# Altium PCB FPv0.13.PcbDoc (part 2 of 2)
Units mm, origin at the board's own origin, x right, y up, seen from the top; angles counter-clockwise.
Board outline 81.28 x 53.34 mm, 4 copper layers (Top Layer, GROUND PLANE, MidLayer1, Bottom Layer); 86 components, 142 nets, 542 pads, 250 vias.
Unrouted connection lines stored in the file: 1.
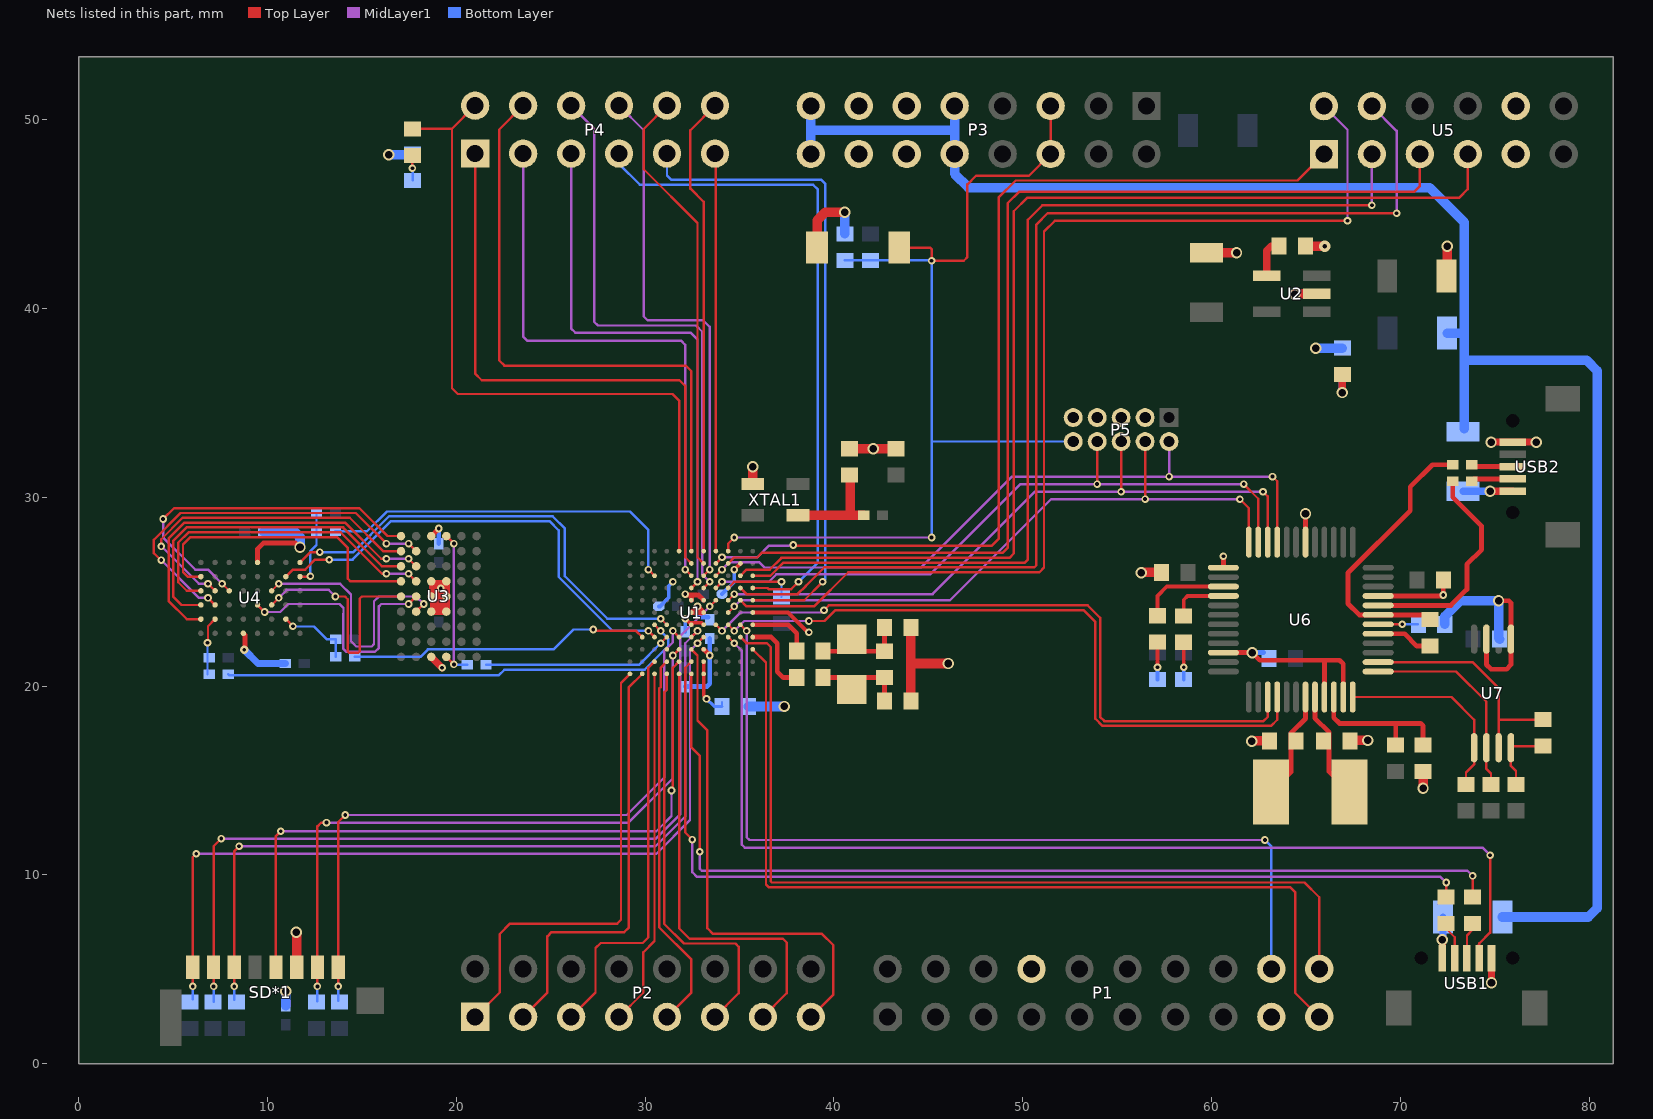
[diagram p4: the nets of this part, all layers, seen from the top]

## Via types
v1: diameter 0.403, hole 0.2, Top Layer to Bottom Layer, tented both sides, 209 vias
v2: diameter 0.6, hole 0.4, Top Layer to Bottom Layer, tented both sides, 39 vias
v3: diameter 0.6, hole 0.24, Top Layer to Bottom Layer, tented both sides, 1 vias
v4: diameter 0.453, hole 0.2, Top Layer to Bottom Layer, tented both sides, 1 vias

## Nets (pads, with @x,y where several pads share a name; then routed paths per layer and width w, separated by ;. In a path a pad name is that pad's centre, name@x,y a point inside that pad or via, vN(x,y) a via of type N, cw(c..) or ccw(c..) an arc to the next point about the centre after c; other vN are vias at no path point) (continued)
ADDR6: U3.F2 U4.C3 | length 14.2
  Top Layer w0.127: U4.C3@10.225,25.05 v1(10.6,25.425) ; U3.F2@17.875,23.95 v1(18.275,24.35)
  MidLayer1 w0.127: v1(10.6,25.425) 13.85,25.425 14.425,24.85 14.425,22.375 14.7,22.1 15.521,22.1 15.646,22.225 15.646,24.496 15.9,24.75 17.875,24.75 v1(18.275,24.35)
ADDR7: U3.E1 U4.C4 | length 13
  Top Layer w0.127: U4.C4@10.225,24.3 v1(10.6,24.675) ; v1(13.6,24.75) 14.1,24.75 14.25,24.6 14.25,21.85 14.326,21.774 14.816,21.774 14.892,21.85 14.892,24.642 15,24.75 U3.E1@17.075,24.75
  MidLayer1 w0.127: v1(10.6,24.675) 11.025,25.1 13.25,25.1 v1(13.6,24.75)
ADDR8: U3.E2 U4.D4 | length 13.6
  Top Layer w0.127: U4.D4@9.475,24.3 v1(9.85,23.925) ; v1(17.475,24.35) U3.E2@17.875,24.75
  MidLayer1 w0.127: v1(9.85,23.925) 10.675,23.925 11.1,24.35 13.825,24.35 14.029,24.146 14.029,23.841 14.025,23.837 14.025,21.975 14.188,21.812 15.687,21.812 15.9,22.025 15.9,24.225 16.025,24.35 v1(17.475,24.35)
ADDR9: U3.D1 U4.H2 | length 16.1
  Top Layer w0.127: U4.H2@6.475,25.8 5.775,25.8 5.529,26.046 5.529,27.499 5.923,27.892 13.683,27.892 14.263,27.313 14.263,25.687 14.4,25.55 U3.D1@17.075,25.55
ADDR10: U3.D2 U4.H3 | length 17.4
  Top Layer w0.127: U4.H3@6.475,25.05 5.725,25.05 5.275,25.5 5.275,27.604 5.818,28.146 13.879,28.146 16.075,25.95 v1(16.3,25.95) ; v1(17.475,25.95) U3.D2@17.875,25.55
  MidLayer1 w0.127: v1(16.3,25.95) v1(17.475,25.95)
ADDR11: U3.C1 U4.H4 | length 17.8
  Top Layer w0.127: U4.H4@6.475,24.3 5.45,24.3 5.021,24.729 5.021,27.709 5.72,28.408 14.006,28.408 16.064,26.35 U3.C1@17.075,26.35
ADDR12: U3.C2 U4.H5 | length 19.8
  Top Layer w0.127: U4.H5@6.475,23.55 5.725,23.55 4.767,24.508 4.767,27.814 5.615,28.662 14.113,28.662 16.025,26.75 v1(16.3,26.75) ; v1(17.475,26.75) U3.C2@17.875,26.35
  MidLayer1 w0.127: v1(16.3,26.75) v1(17.475,26.75)
ADDR13: U3.B1 U4.G3 | length 18.1
  Top Layer w0.127: v1(4.375,27.4) 4.375,27.782 5.509,28.916 14.359,28.916 16.125,27.15 U3.B1@17.075,27.15 ; v1(6.85,25.425) U4.G3@7.225,25.05
  MidLayer1 w0.127: v1@4.409,27.384 6.367,25.425 v1(6.85,25.425)
ADDR14: U3.B2 U4.G4 | length 20.4
  Top Layer w0.127: v1(4.375,26.675) 4.352,26.675 3.983,27.044 3.983,27.749 5.404,29.17 14.68,29.17 v1(16.3,27.55) ; v1(6.85,24.675) U4.G4@7.225,24.3 ; v1(17.475,27.55) U3.B2@17.875,27.15
  MidLayer1 w0.127: v1@4.352,26.675 v1(4.375,26.675) 6.375,24.675 v1(6.85,24.675) ; v1(16.3,27.55) v1(17.475,27.55)
ADDR15: U3.A1 U4.F3 | length 19.1
  Top Layer w0.127: v1(4.475,28.85) 5.049,29.424 14.876,29.424 16.35,27.95 U3.A1@17.075,27.95 ; v1(7.6,25.425) U4.F3@7.975,25.05
  MidLayer1 w0.127: v1(4.475,28.85) 4.475,27.875 6.175,26.175 6.85,26.175 v1(7.6,25.425)
AGND: R10.2 U1.F6 U1.G6 | length 3
  Top Layer w0.254: 32.775,23.9 v1(32.775,24.225) ; v1(32.775,24.225) U1.G6@33.1,23.9 U1.F6@32.45,23.9 v1(32.775,24.225)
  Bottom Layer w0.254: v1(32.775,24.225) 32.775,23.8 32.929,23.646 R10.2@33.347,23.646
ALE: R17.2 U3.A4 U3.J4 | length 8.2
  Top Layer w0.127: U3.J4@19.475,21.55 v1(19.875,21.15) ; U3.A4@19.475,27.95 v1(19.875,27.55)
  MidLayer1 w0.127: v1(19.875,21.15) v1(19.875,27.55)
  Bottom Layer w0.127: v1@19.9,21.125 R17.2@20.575,21.125
AVDD: FB1.2 U1.F5 U1.G5 | length 2.4
  Top Layer w0.203: U1.G5@33.1,23.25 32.995,23.355 32.555,23.355 ; 32.345,23.355 U1.F5@32.45,23.25 32.555,23.355 ; 32.345,23.355 v1(32.125,23.575) 32.345,23.355 ; 32.345,23.355 32.555,23.355
  Bottom Layer w0.203: FB1.2@32.125,22.875 v1(32.125,23.575)
BE23_16: U1.D5 U4.A1 | length 24.3
  Top Layer w0.127: U4.A1@11.725,26.55 12.275,27.1 v1(12.775,27.1) ; v1(30.825,23.575) U1.D5@31.15,23.25
  Bottom Layer w0.127: v1(12.775,27.1) 14.55,27.1 16.446,28.996 25.104,28.996 25.75,28.35 25.75,25.82 27.996,23.575 v1(30.825,23.575)
BE31_24: U1.C4 U4.B2 | length 24.7
  Top Layer w0.127: U4.B2@10.975,25.8 11.35,26.175 12,26.175 12.525,26.7 v1(13.275,26.7) ; v1(30.175,22.925) U1.C4@30.5,22.6
  Bottom Layer w0.127: v1(13.275,26.7) 14.509,26.7 16.551,28.742 24.933,28.742 25.417,28.258 25.417,25.794 28.286,22.925 v1(30.175,22.925)
DAC0: P1.18 U1.K5 | length 45.9
  Top Layer w0.127: U1.K5@35.05,23.25 v1(35.375,22.925)
  MidLayer1 w0.127: v1(35.375,22.925) 35.379,22.921 35.379,11.996 35.525,11.85 v1(62.825,11.85)
  Bottom Layer w0.127: v1(62.825,11.85) 63.165,11.51 P1.18@63.165,5.025
DAC1: P1.20 U1.K4 | length 47.4
  Top Layer w0.127: U1.K4@35.05,22.6 35.368,22.283 36.442,22.283 36.658,22.067 36.658,9.667 36.725,9.6 64.925,9.6 65.705,8.82 P1.20@65.705,5.025
EECLK: R23.2 U6.1 U7.2 | length 10.9
  Top Layer w0.127: U6.1@68.825,20.775 72.95,20.775 74.554,19.171 U7.2@74.554,16.741 74.554,15.621 74.8,15.375 R23.2@74.8,14.8
EECS: R24.2 U6.48 U7.1 | length 10.5
  Top Layer w0.127: U6.48@67.475,19.425 72.7,19.425 73.904,18.221 U7.1@73.904,16.741 73.904,15.854 73.475,15.425 R24.2@73.475,14.8
EEDATA: R25.1 U6.2 U7.3 | length 12.5
  Top Layer w0.127: U6.2@68.825,21.275 73.825,21.275 75.204,19.896 U7.3@75.204,16.741 ; 75.204,18.225 R25.1@77.55,18.225
FB_ALE: R17.1 U1.D4 | length 10.2
  Top Layer w0.127: v1(30.825,22.275) U1.D4@31.15,22.6
  Bottom Layer w0.127: R17.1@21.575,21.125 29.675,21.125 v1(30.825,22.275)
FB_CS0: U1.D3
FB_CS2: R13.2 U1.B4 | length 16
  Top Layer w0.127: v1(27.25,23) 27.325,22.925 29.525,22.925 U1.B4@29.85,22.6
  Bottom Layer w0.127: R13.2@14.625,21.55 18.1,21.55 18.5,21.95 25.15,21.95 26.2,23 v1(27.25,23)
FB_OE: R11.2 U1.C9 | length 20
  Top Layer w0.127: v1(30.175,26.175) U1.C9@30.5,25.85
  Bottom Layer w0.127: R11.2@13.6,28.2 15.275,28.2 16.325,29.25 29.2,29.25 30.175,28.275 v1(30.175,26.175)
FB_RW: R12.2 U1.C5 | length 25.4
  Top Layer w0.127: U1.C5@30.5,23.25 v1(30.825,22.925)
  Bottom Layer w0.127: R12.2@7.925,20.625 7.967,20.583 22.258,20.583 22.546,20.871 29.975,20.871 31.225,22.121 31.225,22.525 v1(30.825,22.925)
FT_RXD: U1.H5 U6.39 | length 36.7
  Top Layer w0.127: U1.H5@33.75,23.25 v1(34.075,22.925) ; v1(39.475,24.025) 39.729,24.279 53.446,24.279 54.1,23.625 54.1,18.375 54.325,18.15 62.75,18.15 62.975,18.375 U6.39@62.975,19.425
  MidLayer1 w0.127: v1(34.075,22.925) 35.05,23.9 39.35,23.9 v1(39.475,24.025)
FT_TXD: U1.J5 U6.40 | length 36.5
  Top Layer w0.127: U1.J5@34.4,23.25 v1(34.725,22.925) ; v1(38.675,23.45) 39.5,23.45 40.075,24.025 53.225,24.025 53.846,23.404 53.846,18.27 54.22,17.896 63.146,17.896 63.475,18.225 U6.40@63.475,19.425
  MidLayer1 w0.127: v1(34.725,22.925) 35.25,23.45 v1(38.675,23.45)
GND: C1.1 C2.1 C3.1 C7.1 C8.2 C12.2 C13.1 C14.2 C15.1 C16.1 C17.1 C18.1 C22.1 C24.2 C27.1 C28.1 C29.1 C32.2 C33.1 C34.1 C35.2 C36.1 C37.1 C38.1 P1.8 P1.17 P3.11 P3.12 P3.13 P3.14 P5.3 P5.5 P5.7 P5.9 R10.1 R30.1 R31.1 R34.1 S3.1 SD*1.6 U1.F7 U1.G3 U1.G7 U1.K10 U1.L6 U2.2 U3.A3 U3.D3 U3.D4 U3.E3 U3.E4 U3.F3 U3.F4 U3.J3 U4.D1 U4.E6 U5.9 U5.10 U6.9 U6.18 U6.25 U6.34 U6.45 U6.47 U7.5 U7.7 USB1.5 USB2.5 XTAL1.2 | length 97.7
  Top Layer w0.203: v1(34.725,26.173) 35.05,26.498 U1.K10@35.05,26.5 ; U1.L6@35.7,23.9 37.575,23.9 38.625,22.85 v1(38.675,22.85)
  Top Layer w0.254: U4.E6@8.725,22.8 8.806,22.719 8.806,22.006 8.775,21.975 v4(8.775,21.925) ; U4.D1@9.475,26.55 9.475,27.275 9.775,27.575 11.5,27.575 v2(11.725,27.35) ; U3.F3@18.675,23.95 U3.F3@18.794,24.069 ; U3.D3@18.675,25.55 18.75,25.475 18.794,25.431 v1@19.075,25.15 ; U3.A3@18.675,27.95 v1(19.075,28.35) ; U3.E3@18.75,24.825 U3.E3@18.675,24.75 18.794,24.631 19.075,24.35 ; U3.D4@19.356,25.431 U3.D4@19.475,25.55 ; v1(32.125,24.875) 32.179,24.821 32.45,24.821 ; U1.F7@32.45,24.55 32.45,24.821 ; U1.G3@33.1,21.95 v1(33.425,21.625) ; U1.G7@33.1,24.55 32.829,24.821 32.45,24.821 ; U6.34@60.625,21.775 v2(62.15,21.775) 62.55,21.375 66.775,21.375 66.975,21.175 U6.47@66.975,19.425 ; U6.25@60.625,26.275 v1(60.625,26.875) ; U6.18@64.975,27.625 v2(64.975,29.125) ; U6.45@65.975,19.425 65.975,21.325 ; U6.9@68.825,24.775 72.25,24.775 72.275,24.8 v1(72.275,24.825) C29.1@72.275,25.625 ; U7.7@74.554,22.491 74.554,21.146 74.8,20.9 75.625,20.9 75.854,21.129 U7.5@75.854,22.491 75.854,24.421 75.75,24.525 v2(75.2,24.525)
  Top Layer w0.381: U3.J3@18.675,21.55 v1(19.25,20.975) ; U3.F3@18.675,23.95 U3.F4@19.475,23.95 ; U3.D3@18.75,25.475 U3.E3@18.75,24.825 ; U3.E3@18.794,24.631 18.794,24.069 19.075,24.35 ; U3.D3@18.794,25.431 19.356,25.431 v1@19.075,25.15 ; U3.D4@19.475,25.55 U3.E4@19.475,24.75 ; v2(74.8,32.925) USB2.5@75.95,32.925 v2(77.2,32.925) ; v2(74.825,4.3) USB1.5@74.825,5.6 ; U3.E3@18.75,24.825 v1@19.075,25.15 ; U3.E3@18.75,24.825 18.825,24.75 U3.E4@19.475,24.75 ; 19.075,24.35 U3.E4@19.475,24.75 ; 19.075,24.35 U3.F4@19.475,23.95 ; v1@19.075,25.15 U3.E4@19.475,24.75 ; U3.F4@19.475,23.95 U3.E4@19.475,24.75
  Top Layer w0.508: SD*1.6@11.547,5.112 v2@11.547,6.953 ; XTAL1.2@35.7,30.7 v2(35.7,31.625) ; S3.1@39.109,43.225 39.109,44.659 39.55,45.1 v2(40.575,45.1) ; C36.1@40.825,32.575 C27.1@43.275,32.575 ; C38.1@44.075,19.225 C37.1@44.075,23.1 ; 44.112,21.2 v2(46.05,21.2) ; v2(56.275,26) 56.3,26.025 C28.1@57.35,26.025 ; C12.2@59.725,42.95 v2(61.325,42.95) ; v2(62.125,17.075) 62.15,17.1 C33.1@63.075,17.1 ; v2(64.4,40.75) 64.425,40.775 U2.2@65.579,40.775 ; C13.1@64.975,43.3 v3(66,43.3) ; C35.2@67.325,17.1 67.35,17.125 v2(68.275,17.125) ; v2(71.2,14.6) C24.2@71.2,15.475 ; C8.2@72.475,41.625 v2(72.475,43.3)
  Bottom Layer w0.203: C2.1@30.725,24.225 30.783,24.225 31.255,24.697 31.255,25.305 v1(31.475,25.525) ; C14.2@34.075,24.875 34.725,25.525 v1(34.725,26.173)
  Bottom Layer w0.254: C18.1@19.075,24.4 19.075,25.15 19.1,25.175 v1(19.175,25.175) ; C15.1@19.075,27.55 v1(19.075,28.35) ; C1.1@32.125,19.975 33.275,19.975 33.425,20.125 v1(33.425,21.625) ; v1(33.425,21.625) R10.1@33.425,22.525 ; v2(62.15,21.775) C22.1@62.75,21.775
  Bottom Layer w0.381: v4(8.775,21.925) 9.5,21.2 C16.1@10.95,21.2
  Bottom Layer w0.508: C3.1@9.8,28.175 11.45,28.175 11.725,27.9 v2(11.725,27.35) ; C17.1@10.975,3.075 v2(10.975,3.85) ; v2(16.425,48.15) R34.1@17.65,48.15 ; R30.1@35.475,18.925 v2(37.375,18.925) ; C7.1@40.575,43.95 v2(40.575,45.1) ; v2(65.525,37.9) R31.1@66.925,37.9 ; C32.2@72.35,23.275 72.35,23.7 73.175,24.525 v2(75.2,24.525) 75.2,22.545 C34.1@75.254,22.491
  other v2: 11.525,6.975 42.075,32.575
JTAG_TCK: P5.4 U1.J6 U6.24 | length 35.1
  Top Layer w0.127: U1.J6@34.4,23.9 v1(34.725,24.225) ; v1(56.48,29.905) P5.4@56.48,32.955 ; v1(61.5,29.9) 61.975,29.425 U6.24@61.975,27.625
  MidLayer1 w0.127: v1(34.725,24.225) 35.05,24.55 46.15,24.55 51.5,29.9 v1@61.475,29.9
JTAG_TDI: P5.8 U1.H8 U6.23 | length 35.9
  Top Layer w0.127: U1.H8@33.75,25.2 v1(34.075,25.525) ; v1(53.94,30.7) P5.8@53.94,32.955 ; v1(61.7,30.7) 62.475,29.925 U6.23@62.475,27.625
  MidLayer1 w0.127: v1(34.075,25.525) 36.55,25.525 36.944,25.919 45.094,25.919 49.875,30.7 v1(53.94,30.7) v1(61.7,30.7)
JTAG_TDO: P5.6 U1.J7 U6.22 | length 36.1
  Top Layer w0.127: U1.J7@34.4,24.55 v1(34.725,24.875) ; v1(55.21,30.3) P5.6@55.21,32.955 ; v1(62.725,30.3) 62.975,30.05 U6.22@62.975,27.625
  MidLayer1 w0.127: v1(34.725,24.875) 45.225,24.875 50.65,30.3 v1(55.21,30.3) v1(62.725,30.3)
JTAG_TMS: P5.2 U1.H9 U6.21 | length 37.3
  Top Layer w0.127: U1.H9@33.752,25.85 v1(34.075,26.173) ; v1(63.225,31.1) 63.475,30.85 U6.21@63.475,27.625
  MidLayer1 w0.127: v1(34.075,26.173) 34.473,26.571 36.029,26.571 36.317,26.283 44.617,26.283 49.434,31.1 v1(57.75,31.1) ; P5.2@57.75,32.955 v1(57.75,31.1) ; v1(63.225,31.1) v1(57.75,31.1)
MRF_CS: U1.K9 U5.7 | length 59.5
  Top Layer w0.127: U1.K9@35.05,25.85 35.375,26.175 36.6,26.175 37.221,26.796 49.296,26.796 49.525,27.025 49.525,45.15 50.25,45.875 73.125,45.875 73.57,46.32 U5.7@73.57,48.175
MRF_INT: U1.K7 U5.2 | length 57.8
  Top Layer w0.127: U1.K7@35.05,24.55 35.375,24.225 38.95,24.225 40.759,26.034 50.884,26.034 51.125,26.275 51.125,44.075 51.7,44.65 v1(67.2,44.65)
  MidLayer1 w0.127: U5.2@65.95,50.715 67.2,49.465 v1(67.2,44.65)
MRF_SCK: U1.L9 U5.3 | length 54.2
  Top Layer w0.127: U1.L9@35.7,25.85 36.634,25.85 37.326,26.542 50.117,26.542 50.275,26.7 50.275,44.7 51.034,45.459 v1@68.49,45.459
  MidLayer1 w0.127: v1(68.49,45.465) U5.3@68.49,48.175
MRF_SDI: U1.H10 U5.1 | length 51.7
  Top Layer w0.127: U1.H10@33.75,26.5 v1(34.075,26.825) ; v1@37.85,27.445 48.37,27.445 48.725,27.8 48.725,45.875 49.629,46.779 64.554,46.779 U5.1@65.95,48.175
  MidLayer1 w0.127: v1(34.075,26.825) 35.95,26.825 36.57,27.445 v1@37.82,27.445
  other v1: 37.85,27.475
MRF_SDO: U1.J10 U5.5 | length 57.3
  Top Layer w0.127: U1.J10@34.4,26.5 34.716,26.816 35.94,26.816 36.2,27.075 48.95,27.075 49.2,27.325 49.2,45.575 49.8,46.175 70.725,46.175 71.03,46.48 U5.5@71.03,48.175
MRF_WAKE: U1.K8 U5.4 | length 60
  Top Layer w0.127: U1.K8@35.05,25.2 35.375,24.875 38.079,24.875 38.517,25.313 38.517,25.317 39.488,26.288 50.613,26.288 50.725,26.4 50.725,44.45 51.325,45.05 v1(69.8,45.05)
  MidLayer1 w0.127: U5.4@68.49,50.715 69.8,49.405 v1(69.8,45.05)
N_RST: C7.2 P3.5 P3.6 P5.10 R32.2 S3.2 U1.J11 | length 53.8
  Top Layer w0.127: U1.J11@34.4,27.15 34.4,27.55 v1(34.725,27.875) ; S3.2@43.459,43.225 45.1,43.225 45.175,43.15 v1(45.175,42.525) 46.875,42.525 47.071,42.721 47.071,46.571 47.533,47.033 50.324,47.033 P3.6@51.476,48.185 P3.5@51.476,50.725
  MidLayer1 w0.127: v1(34.725,27.875) v1(45.175,27.875)
  Bottom Layer w0.127: C7.2@40.575,42.55 v1@45.175,42.55 ; v1(45.175,27.875) v1(45.175,42.525) ; 45.205,32.955 P5.10@52.67,32.955
NetC13_2: C13.2 U2.4 | length 2.1
  Top Layer w0.381: U2.4@62.921,41.725 62.921,43.071 63.15,43.3 C13.2@63.575,43.3
NetC24_1: C24.1 R1.2 U6.46 | length 8.2
  Top Layer w0.254: U6.46@66.475,19.425 66.475,18.325 66.775,18.025 71.075,18.025 71.2,17.9 C24.1@71.2,16.875 ; R1.2@69.75,16.875 69.75,18
NetC32_1: C32.1 U6.6 | length 2.1
  Top Layer w0.127: U6.6@68.825,23.275 v1(70.1,23.275)
  Bottom Layer w0.127: v1(70.1,23.275) C32.1@70.925,23.275
NetC33_2: C33.2 U6.43 Y2.2 | length 5.8
  Top Layer w0.254: Y2.2@63.15,14.4 64.2,15.45 64.2,17.5 64.975,18.275 U6.43@64.975,19.425
NetC35_1: C35.1 U6.44 Y2.1 | length 5.8
  Top Layer w0.254: U6.44@65.475,19.425 65.475,18.3 66.225,17.55 66.225,17.325 66.225,15.475 Y2.1@67.3,14.4
NetC36_2: C36.2 FB2.2 XTAL1.4 | length 5.5
  Top Layer w0.508: XTAL1.4@38.1,29.049 40.875,29.05 ; C36.2@40.875,31.125 40.875,29.05 ; FB2.2@41.575,29.05 40.875,29.05
NetC37_2: C37.2 R26.1 R27.1 Y1.1 | length 4.3
  Top Layer w0.254: R26.1@39.429,21.852 R27.1@42.474,21.852 ; R27.1@42.675,21.85 C37.2@42.675,23.1
NetC38_2: C38.2 R27.2 R28.1 Y1.2 | length 4.3
  Top Layer w0.254: R28.1@39.429,20.455 R27.2@42.477,20.455 ; C38.2@42.675,19.225 R27.2@42.675,20.45
NetL1_2: L1.2 R34.2 | length 1.3
  Top Layer w0.127: v1@17.675,47.45 L1.2@17.675,48.1
  Bottom Layer w0.127: v1(17.675,47.425) 17.688,47.412 R34.2@17.688,46.788
NetL3_2: L3.2 R31.2 | length 1.9
  Top Layer w0.381: v2(66.925,35.55) L3.2@66.925,36.5
  Bottom Layer w0.381: v2(66.925,35.55) R31.2@66.925,36.5
NetL4_1: L4.1 R18.1 | length 2
  Top Layer w0.203: v1(58.525,21) L4.1@58.525,22.325
  Bottom Layer w0.203: R18.1@58.525,20.347 v1(58.525,21)
NetL5_1: L5.1 R19.1 | length 2
  Top Layer w0.203: L5.1@57.134,22.329 57.134,21.031 v1@57.165,21
  Bottom Layer w0.203: R19.1@57.134,20.351 v1@57.134,20.996 ; v1(57.136,20.999) 57.138,21 v1@57.165,21
NetR2_2: R2.2 USB1.2 | length 2
  Top Layer w0.127: R2.2@72.425,7.425 72.425,7.15 72.875,6.7 USB1.2@72.875,5.6
NetR3_2: R3.2 USB1.3 | length 1.9
  Top Layer w0.127: USB1.3@73.525,5.6 73.525,6.8 73.825,7.1 R3.2@73.825,7.425
NetR9_2: R9.2 U1.J8 | length 3.8
  Top Layer w0.127: U1.J8@34.4,25.2 34.725,25.525 v1(37.225,25.525)
  Bottom Layer w0.127: R9.2@37.225,24.725 v1(37.225,25.525)
NetR11_1: R11.1 R16.1 U4.A2 | length 4
  Top Layer w0.127: U4.A2@11.725,25.8 v1@12.25,25.8
  Bottom Layer w0.127: v1(12.275,25.825) 12.275,27.154 12.6,27.479 R11.1@12.6,28.2 R16.1@12.6,29.125
NetR12_1: R12.1 R15.1 U4.G5 | length 3.1
  Top Layer w0.127: v1@6.85,22.3 6.85,23.175 U4.G5@7.225,23.55
  Bottom Layer w0.127: R12.1@6.825,20.625 v1(6.825,22.3)
NetR13_1: R13.1 R14.1 U4.B5 | length 4
  Top Layer w0.127: U4.B5@10.975,23.55 v1(11.35,23.175)
  Bottom Layer w0.127: v1(11.35,23.175) 11.367,23.158 12.467,23.158 13.15,22.475 R14.1@13.625,22.475 R13.1@13.625,21.55
NetR20_1: R20.1 USB2.2 | length 2.1
  Top Layer w0.254: R20.1@73.9,30.975 USB2.2@75.95,30.975
NetR21_1: R21.1 USB2.3 | length 2.1
  Top Layer w0.254: R21.1@73.85,31.625 USB2.3@75.95,31.625
NetR22_2: R22.2 R25.2 U7.4 | length 3.7
  Top Layer w0.127: U7.4@75.854,16.741 75.854,15.771 76.125,15.5 R22.2@76.125,14.8 ; U7.4@75.938,16.825 R25.2@77.55,16.825
NetR29_2: R29.2 U6.5 | length 3
  Top Layer w0.254: U6.5@68.825,22.775 70.225,22.775 70.875,22.125 R29.2@71.575,22.125
NetR30_2: R30.2 U1.G1 U1.G2 | length 3.3
  Top Layer w0.178: U1.G2@33.1,21.3 U1.G1@33.1,20.65 33.1,19.475 v1(33.25,19.325)
  Bottom Layer w0.127: R30.2@34.075,18.925 R30.2@34.075,19.15
  Bottom Layer w0.178: v1(33.25,19.325) 33.65,18.925 R30.2@34.075,18.925
PTA13: P4.9 U1.L7 | length 35
  Top Layer w0.127: U1.L7@35.7,24.55 38.425,24.55 v1(39.4,25.525)
  Bottom Layer w0.127: P4.9@31.161,48.205 31.161,47.039 31.375,46.825 39.325,46.825 39.55,46.6 39.55,25.675 v1(39.4,25.525)
PTA15: P4.7 U1.L8 | length 35.5
  Top Layer w0.127: U1.L8@35.7,25.2 36.475,25.2 36.542,25.133 37.733,25.133 v1(38.125,25.525)
  Bottom Layer w0.127: P4.7@28.621,48.205 28.621,47.654 29.725,46.55 38.9,46.55 39.15,46.3 39.15,26.55 v1(38.125,25.525)
PTA29: P4.11 U1.H11 | length 21.1
  Top Layer w0.127: U1.H11@33.75,27.15 P4.11@33.75,48.205
PTB0: P4.12 U1.G11 | length 24.4
  Top Layer w0.127: U1.G11@33.1,27.15 33.1,45.65 32.4,46.35 32.4,49.444 P4.12@33.701,50.745
PTB1: P4.10 U1.G10 | length 26.1
  Top Layer w0.127: P4.10@31.161,50.745 29.925,49.509 29.925,47.375 32.775,44.525 32.775,26.825 U1.G10@33.1,26.5
PTB2: P4.8 U1.G9 | length 28.7
  Top Layer w0.127: U1.G9@33.1,25.85 v1(33.425,26.175)
  MidLayer1 w0.127: P4.8@28.621,50.745 29.925,49.441 29.925,39.575 30.125,39.375 33.075,39.375 33.425,39.025 v1(33.425,26.175)
PTB3: P4.6 U1.G8 | length 31.8
  Top Layer w0.127: U1.G8@33.1,25.2 v1(33.425,25.525)
  MidLayer1 w0.127: P4.6@26.081,50.745 27.3,49.526 27.3,39.3 27.5,39.1 32.7,39.1 33.029,38.771 33.029,25.921 v1(33.425,25.525)
PTB6: P4.4 U1.F11 | length 34
  Top Layer w0.127: P4.4@23.541,50.745 22.275,49.479 22.275,37.25 22.55,36.975 32.15,36.975 32.45,36.675 U1.F11@32.45,27.15
PTB7: L1.1 P4.2 U1.E11 | length 37.8
  Top Layer w0.127: L1.1@17.694,49.519 19.775,49.519 ; P4.2@21.001,50.745 19.775,49.519 ; U1.E11@31.8,27.15 31.8,35.125 31.45,35.475 20.075,35.475 19.775,35.775 19.775,49.519
PTB20: P4.1 U1.F10 | length 32.6
  Top Layer w0.127: P4.1@21.001,48.205 21.001,36.549 21.35,36.2 31.825,36.2 32.125,35.9 32.125,26.825 U1.F10@32.45,26.5
PTB21: P4.3 U1.F9 | length 30.8
  Top Layer w0.127: v1(32.125,26.175) U1.F9@32.45,25.85
  MidLayer1 w0.127: P4.3@23.541,48.205 23.541,38.509 23.75,38.3 31.9,38.3 32.125,38.075 v1(32.125,26.175)
PTB22: P4.5 U1.F8 | length 29.5
  Top Layer w0.127: U1.F8@32.45,25.2 v1(32.775,25.525)
  MidLayer1 w0.127: P4.5@26.081,48.205 26.081,38.944 26.3,38.725 32.4,38.725 32.775,38.35 v1(32.775,25.525)
PTD7: P2.1 U1.A1 | length 24.9
  Top Layer w0.127: P2.1@21.001,2.485 22.3,3.784 22.3,6.875 22.85,7.425 28.525,7.425 28.725,7.625 28.725,20.175 U1.A1@29.2,20.65
PTD10: P2.3 U1.B1 | length 23
  Top Layer w0.127: P2.3@23.541,2.485 24.825,3.769 24.825,6.75 25.05,6.975 28.9,6.975 29.125,7.2 29.125,19.925 U1.B1@29.85,20.65
PTD11: P2.5 U1.C2 | length 21.9
  Top Layer w0.127: P2.5@26.081,2.485 27.375,3.779 27.375,6.125 27.65,6.4 29.875,6.4 30.175,6.7 30.175,20.975 U1.C2@30.5,21.3
PTD12: P2.7 U1.C1 | length 18.9
  Top Layer w0.127: P2.7@28.621,2.485 29.9,3.764 29.9,5.9 30.5,6.5 U1.C1@30.5,20.65
PTD13: P2.9 U1.D2 | length 20.2
  Top Layer w0.127: U1.D2@31.15,21.3 30.835,20.984 30.835,19.96 30.754,19.879 30.754,7.221 32.45,5.525 32.45,3.774 P2.9@31.161,2.485
PTD14: P2.11 U1.D1 | length 22
  Top Layer w0.127: U1.D1@31.15,20.65 31.15,19.8 31.008,19.658 31.008,7.417 32.054,6.371 34.779,6.371 34.95,6.2 34.95,3.734 P2.11@33.701,2.485
PTD15: P2.13 U1.E1 | length 23.9
  Top Layer w0.127: U1.E1@31.8,20.65 31.8,7.175 32.35,6.625 37.3,6.625 37.5,6.425 37.5,3.744 P2.13@36.241,2.485
PTE0: R8.2 SD*1.8 U1.E4 | length 36.1
  Top Layer w0.127: v1(13.75,4.1) 13.747,4.103 SD*1.8@13.747,5.112 13.747,12.797 v1(14.125,13.175) ; v1(31.475,22.925) U1.E4@31.8,22.6
  MidLayer1 w0.127: v1(14.125,13.175) 29.025,13.175 31.025,15.175 31.025,21.875 31.475,22.325 v1(31.475,22.925)
  Bottom Layer w0.127: R8.2@13.75,3.35 v1(13.75,4.1)
PTE1: R7.2 SD*1.7 U1.E3 | length 36.1
  Top Layer w0.127: v1(12.647,4.1) SD*1.7@12.647,5.112 12.647,12.572 12.85,12.775 v1(13.125,12.775) ; v1(31.475,21.625) U1.E3@31.8,21.95
  MidLayer1 w0.127: v1(13.125,12.775) 29.125,12.775 31.475,15.125 v1(31.475,21.625)
  Bottom Layer w0.127: R7.2@12.647,3.322 v1(12.647,4.1)
PTE2: SD*1.5 U1.E2 | length 36.7
  Top Layer w0.127: SD*1.5@10.447,5.112 10.447,12.064 v1(10.7,12.317) ; v1@31.475,14.475 31.475,20.975 U1.E2@31.8,21.3
  MidLayer1 w0.127: v1(10.7,12.317) 30.592,12.317 31.4,13.125 v1(31.4,14.475)
PTE3: R6.2 SD*1.3 U1.F4 | length 43.1
  Top Layer w0.127: v1(8.247,4.1) SD*1.3@8.247,5.112 8.247,11.264 v1(8.5,11.517) ; U1.F4@32.45,22.6 v1(32.775,22.925)
  MidLayer1 w0.127: v1(8.5,11.517) 30.542,11.517 32.125,13.1 32.125,22.275 v1(32.775,22.925)
  Bottom Layer w0.127: R6.2@8.247,3.378 v1(8.247,4.1)
PTE4: R5.2 SD*1.2 U1.H7 | length 45.8
  Top Layer w0.127: v1(7.147,4.1) SD*1.2@7.147,5.112 7.147,11.522 v1(7.55,11.925) ; v1(33.425,24.225) U1.H7@33.75,24.55
  MidLayer1 w0.127: v1(7.55,11.925) 30.575,11.925 31.871,13.221 31.871,22.671 v1(33.425,24.225)
  Bottom Layer w0.127: R5.2@7.147,3.297 v1(7.147,4.1)
PTE5: R4.2 SD*1.1 U1.G4 | length 44.7
  Top Layer w0.127: v1(6.047,4.1) SD*1.1@6.047,5.112 6.047,10.947 v1(6.225,11.125) ; v1(32.775,22.275) U1.G4@33.1,22.6
  MidLayer1 w0.127: v1(6.225,11.125) 30.6,11.125 32.379,12.904 32.379,21.879 v1(32.775,22.275)
  Bottom Layer w0.127: R4.2@6.047,3.422 v1(6.047,4.1)
PTE6: P2.15 U1.F3 | length 26.5
  Top Layer w0.127: U1.F3@32.45,21.95 32.775,21.625 32.775,18.175 33.3,17.65 33.3,7.179 33.6,6.879 39.371,6.879 39.975,6.275 39.975,3.679 P2.15@38.781,2.485
RTCX1: R26.2 U1.L5 | length 3.5
  Top Layer w0.254: U1.L5@35.7,23.25 37.575,23.25 38.029,22.796 R26.2@38.029,21.852
RTCX2: R28.2 U1.L4 | length 4.1
  Top Layer w0.254: U1.L4@35.7,22.6 36.675,22.6 37,22.275 37,20.775 37.32,20.455 R28.2@38.029,20.455
RXD_LED: L4.2 U6.28 | length 3
  Top Layer w0.203: L4.2@58.525,23.725 58.525,24.575 58.725,24.775 U6.28@60.625,24.775
TXD_LED: L5.2 U6.27 | length 4.7
  Top Layer w0.203: L5.2@57.134,23.729 57.134,24.784 57.625,25.275 U6.27@60.625,25.275
USB0D_N: R20.2 U6.8 | length 11.7
  Top Layer w0.254: U6.8@68.825,24.275 72.675,24.275 73.525,25.125 73.525,26.45 74.3,27.225 74.3,28.475 72.775,30 R20.2@72.775,30.85
USB0D_P: R21.2 R29.1 U6.7 | length 14.6
  Top Layer w0.254: R29.1@71.325,23.775 U6.7@68.825,23.775 67.825,23.775 67.225,24.375 67.225,26 70.525,29.3 70.525,30.55 71.7,31.725 R21.2@72.775,31.725
USB1_ID: U1.J4 USB1.4 | length 57.5
  Top Layer w0.127: U1.J4@34.4,22.6 v1(34.725,22.275) ; USB1.4@74.15,5.6 74.15,6.3 ; USB1.4@74.175,5.6 74.175,6.375 74.75,6.95 v1(74.75,11.05)
  MidLayer1 w0.127: v1(34.725,22.275) 35.125,21.875 35.125,11.6 35.275,11.45 74.35,11.45 v1(74.75,11.05)
USB1D_N: R2.1 U1.F2 | length 52.4
  Top Layer w0.127: U1.F2@32.45,21.3 32.125,20.975 32.125,12.25 v1(32.5,11.875) ; R2.1@72.425,8.825 v1(72.425,9.6)
  MidLayer1 w0.127: v1(32.5,11.875) 32.5,10.15 32.75,9.9 72.125,9.9 v1(72.425,9.6)
USB1D_P: R3.1 U1.F1 | length 52.7
  Top Layer w0.127: U1.F1@32.45,20.65 32.45,16.75 32.9,16.3 v1(32.9,11.225) ; R3.1@73.825,8.825 v1(73.825,9.95)
  MidLayer1 w0.127: v1(32.9,11.225) 32.9,10.325 33,10.225 73.55,10.225 v1(73.825,9.95)
VBUS0: D1.1 USB2.1 | length 2.7
  Top Layer w0.381: v2(74.75,30.325) USB2.1@75.95,30.325
  Bottom Layer w0.381: D1.1@73.325,30.325 v2@74.775,30.325 ; v2@74.725,30.35 v2(74.75,30.325)
VBUS1: D2.1 USB1.1 | length 2.2
  Top Layer w0.381: USB1.1@72.225,5.6 v2(72.225,6.575)
  Bottom Layer w0.381: v2(72.225,6.575) 72.25,6.6 D2.1@72.25,7.775
VCC: D1.2 D2.2 F1.1 P3.9 P3.10 P3.15 P3.16 | length 95.7
  Bottom Layer w0.508: P3.16@38.776,48.185 38.776,49.45 ; P3.15@38.776,50.725 38.776,49.45 ; 46.371,49.45 38.776,49.45 ; P3.9@46.396,50.725 P3.10@46.396,48.185 46.396,47.129 47.125,46.4 71.55,46.4 73.375,44.575 73.375,36.1 ; F1.1@72.475,38.7 73.35,38.7 73.375,38.725 ; D1.2@73.375,33.625 73.375,36.1 ; D2.2@75.4,7.775 79.95,7.775 80.425,8.25 80.425,36.7 79.875,37.25 73.375,37.25 73.375,36.1
VREF: P1.19 U1.L3 | length 48.1
  Top Layer w0.127: U1.L3@35.7,21.95 36.404,21.246 36.404,9.496 36.554,9.346 64.179,9.346 64.425,9.1 64.425,3.765 P1.19@65.705,2.485
pads on no net: P1.2 P1.4 P1.6 P1.10 P1.12 P2.2 P2.4 P2.6 P2.8 P2.10 P2.12 P2.14 P2.16 P3.1 P3.2 SD*1.0 U1.A4 U1.A5 U1.A6 U1.A9 U1.A10 U1.A11 U1.B5 U1.B6 U1.B8 U1.B11 U1.C11 U1.D11 U1.E8 U1.H4 U1.H6 U1.J9 U1.K3 U1.K11 U3.A2 U3.A5 U3.B3 U3.B4 U3.H3 U3.H4 U3.J2 U3.J5 U4.E3 U4.H6 U5.6 U5.8 U6.11 U6.12 U6.13 U6.15 U6.16 U6.17 U6.19 U6.20 U6.29 U6.30 U6.32 U6.33 U6.35 U6.36 U6.37 U6.38 U6.41 USB1.0 USB1.6 USB1.7 USB2.0 USB2.4 USB2.6 USB2.7 XTAL1.1

## Polygon pours and split planes (outlines as drawn)
GND on GROUND PLANE (split plane): 80.77,0.51 0.51,0.51 0.51,52.83 80.77,52.83

## Keep-outs
Keep-Out Layer:
  the board outline again, w0.254

## Silkscreen, mask and mechanical layers (free items; w line width, h text height)
Top Overlay:
  text "NC" at 56.075,46.125 h0.76
  text "3.3V" at 53.5,46.1 h0.76
  text "RST" at 50.95,46.075 h0.76
  text "GND" at 40.55,46.05 h0.76
  text "VCC" at 45.775,46.05 h0.76
  text "3.3V" at 48.375,46.05 h0.76
  text "VCC" at 38,46.025 h0.76
  text "GND" at 43.15,46 h0.76
  text "PTB7" at 20.3,45.975 h0.76
  text "PTB6" at 22.75,45.975 h0.76
  text "PTB3" at 25.35,45.975 h0.76
  text "PTB2" at 27.8,45.975 h0.76
  text "PTB1" at 30.4,45.975 h0.76
  text "PTB0" at 32.9,45.975 h0.76
  text "INT" at 65.3,45.875 h0.76
  text "WAKE" at 67.55,45.85 h0.76
  text "PTB20" at 20.075,45 h0.76
  text "PTB21" at 22.75,44.95 h0.76
  text "PTA15" at 27.65,44.95 h0.76
  text "PTA13" at 30.325,44.95 h0.76
  text "PTB22" at 25.2,44.925 h0.76
  text "PTA29" at 32.9,44.925 h0.76
  text "3.3V" at 78.225,44.725 h0.76
  text "SDI" at 65.375,44.7 h0.76
  text "SCK" at 67.975,44.7 h0.76
  text "SDO" at 70.575,44.7 h0.76
  text "CS" at 73.3,44.7 h0.76
  text "GND" at 75.55,44.7 h0.76
  text "470P" at 63.825,44.025 h0.51
  text "+" at 69.35,43.05 h0.51 r90
  text "RST" at 44.425,42.975 h0.51
  text "GND" at 38.175,42.7 h0.51 r90
  text "10uF" at 70.175,41.525 h0.76
  text "2.2uF" at 59.95,40.575 h0.76 r90
  text "+" at 58.2,39.525 h0.51
  text "3.3V" at 62.425,38.775 h0.51
  text "3.3V" at 59.225,38.375 h0.51
  text ">" at 66.7,37.375 h0.76 r270
  text "3.3V" at 57.2,35.45 h0.76
  text "105" at 44.425,31.525 h0.51 r90
  text "104" at 40.05,31.5 h0.51 r90
  text "GND" at 34.3,31.3 h0.51 r270
  text "27R" at 72.15,30.9 h0.51 r90
  text "FB" at 41.8,28.15 h0.51
  text "104" at 57.475,26.725 h0.51
  text "104" at 71.4,26.475 h0.51
  text "12P" at 43.025,23.8 h0.51
  text ">" at 57.275,22.925 h0.51 r90
  text ">" at 58.675,22.925 h0.51 r90
  text "1.5K" at 72.725,22.25 h0.51 r90
  text "0R" at 37.35,20.925 h0.51 r90
  text "1M" at 43.725,20.8 h0.51 r90
  text "12P" at 43.075,18.075 h0.51
  text "27P" at 64.8,17.775 h0.51
  text "470R" at 69.25,17.6 h0.51
  text "104" at 70.8,17.575 h0.51
  text "2.2K" at 78.625,17.15 h0.51 r90
  text "10K" at 77.175,13.75 h0.51 r90
  text "6MHZ" at 65.475,13.325 h0.76 r90
  text "0R" at 72.925,9.5 h0.51
  text "NC" at 44.925,8.35 h0.76
  text "NC" at 47.375,8.35 h0.76
  text "GND" at 49.675,8.35 h0.76
  text "NC" at 55.025,8.35 h0.76
  text "ADC0" at 57.225,8.35 h0.76
  text "DAC0" at 62.375,8.35 h0.76
  text "DAC1" at 64.825,8.35 h0.76
  text "NC" at 33.1,8.325 h0.76
  text "NC" at 35.75,8.325 h0.76
  text "NC" at 38.25,8.325 h0.76
  text "NC" at 42.275,8.325 h0.76
  text "NC" at 52.5,8.325 h0.76
  text "ADC1" at 59.75,8.325 h0.76
  text "NC" at 23.15,8.3 h0.76
  text "NC" at 28.05,8.3 h0.76
  text "NC" at 20.625,8.275 h0.76
  text "NC" at 25.725,8.275 h0.76
  text "NC" at 30.575,8.275 h0.76
  text "3.3V" at 9.55,7.225 h0.76 r90
  text "PTE2" at 10.675,7.2 h0.76 r90
  text "PTE5" at 6.25,7.175 h0.76 r90
  text "PTE1" at 12.8,7.175 h0.76 r90
  text "PTE0" at 13.95,7.175 h0.76 r90
  text "PTE4" at 7.375,7.15 h0.76 r90
  text "PTE3" at 8.475,7.15 h0.76 r90
  text "A1DM0" at 59.5,7.125 h0.76
  text "GND" at 62.5,7.125 h0.76
  text "VREF" at 64.775,7.125 h0.76
  text "A0DM0" at 54.45,7.1 h0.76
  text "A1DP0" at 57.15,7.1 h0.76
  text "A1DP1" at 46.9,7.075 h0.76
  text "A1DM1" at 49.325,7.075 h0.76
  text "A0DP0" at 51.975,7.075 h0.76
  text "A0DM1" at 44.225,7.05 h0.76
  text "A0DP1" at 41.675,7.025 h0.76
  text "PTD7" at 20.25,7 h0.76
  text "PTD10" at 22.6,7 h0.76
  text "PTD11" at 25.1,7 h0.76
  text "PTD12" at 27.575,7 h0.76
  text "PTD13" at 30.1,7 h0.76
  text "PTD14" at 32.5,7 h0.76
  text "PTD15" at 35.15,7 h0.76
  text "PTE6" at 37.9,7 h0.76
Bottom Overlay:
  text "0R" at 60.15,49.75 h0.76 r90
  text "104" at 40.9,41.45 h0.51
  text "10K" at 42.225,41.425 h0.51
  text "F" at 71.15,38.475 h0.76
  text ">" at 73.5,31.8 h0.76 r90
  text "10K" at 14.525,29.5 h0.51 r90
  text "104" at 9.6,28.65 h0.51
  text "0R" at 14.2,27.95 h0.51 r270
  text "104" at 18.625,27.425 h0.51 r90
  text "104" at 31.8,24.675 h0.51
  text "10K" at 38.25,24.475 h0.51 r90
  text "104" at 34.4,24.15 h0.51
  text "104" at 18.5,23.975 h0.51 r90
  text "10K" at 15.525,22.825 h0.51 r90
  text "FB" at 31.65,22.575 h0.51 r90
  text "0R" at 34.2,22.55 h0.51 r90
  text "104" at 64.15,22.3 h0.76
  text "33nF" at 72.375,22.05 h0.76
  text "10K" at 6.275,21.85 h0.51 r90
  text "0R" at 15.5,21.8 h0.51 r90
  text "104" at 31.625,20.825 h0.51 r90
  text "104" at 11.775,20.4 h0.51
  text "0R" at 5.975,20.375 h0.51 r270
  text "100R" at 21.55,20.3 h0.51
  text "2K" at 58.225,19.175 h0.76
  text "10K" at 34.475,18.025 h0.51 r180
  text ">" at 73.7,7.55 h0.76
  text "104" at 10.375,2.925 h0.51 r90
  text "10K" at 7.45,0.825 h0.51
  text "10K" at 13.6,0.825 h0.51